# EAGLE board shutter_control_without_autorouter (EAGLE 7.1.0)
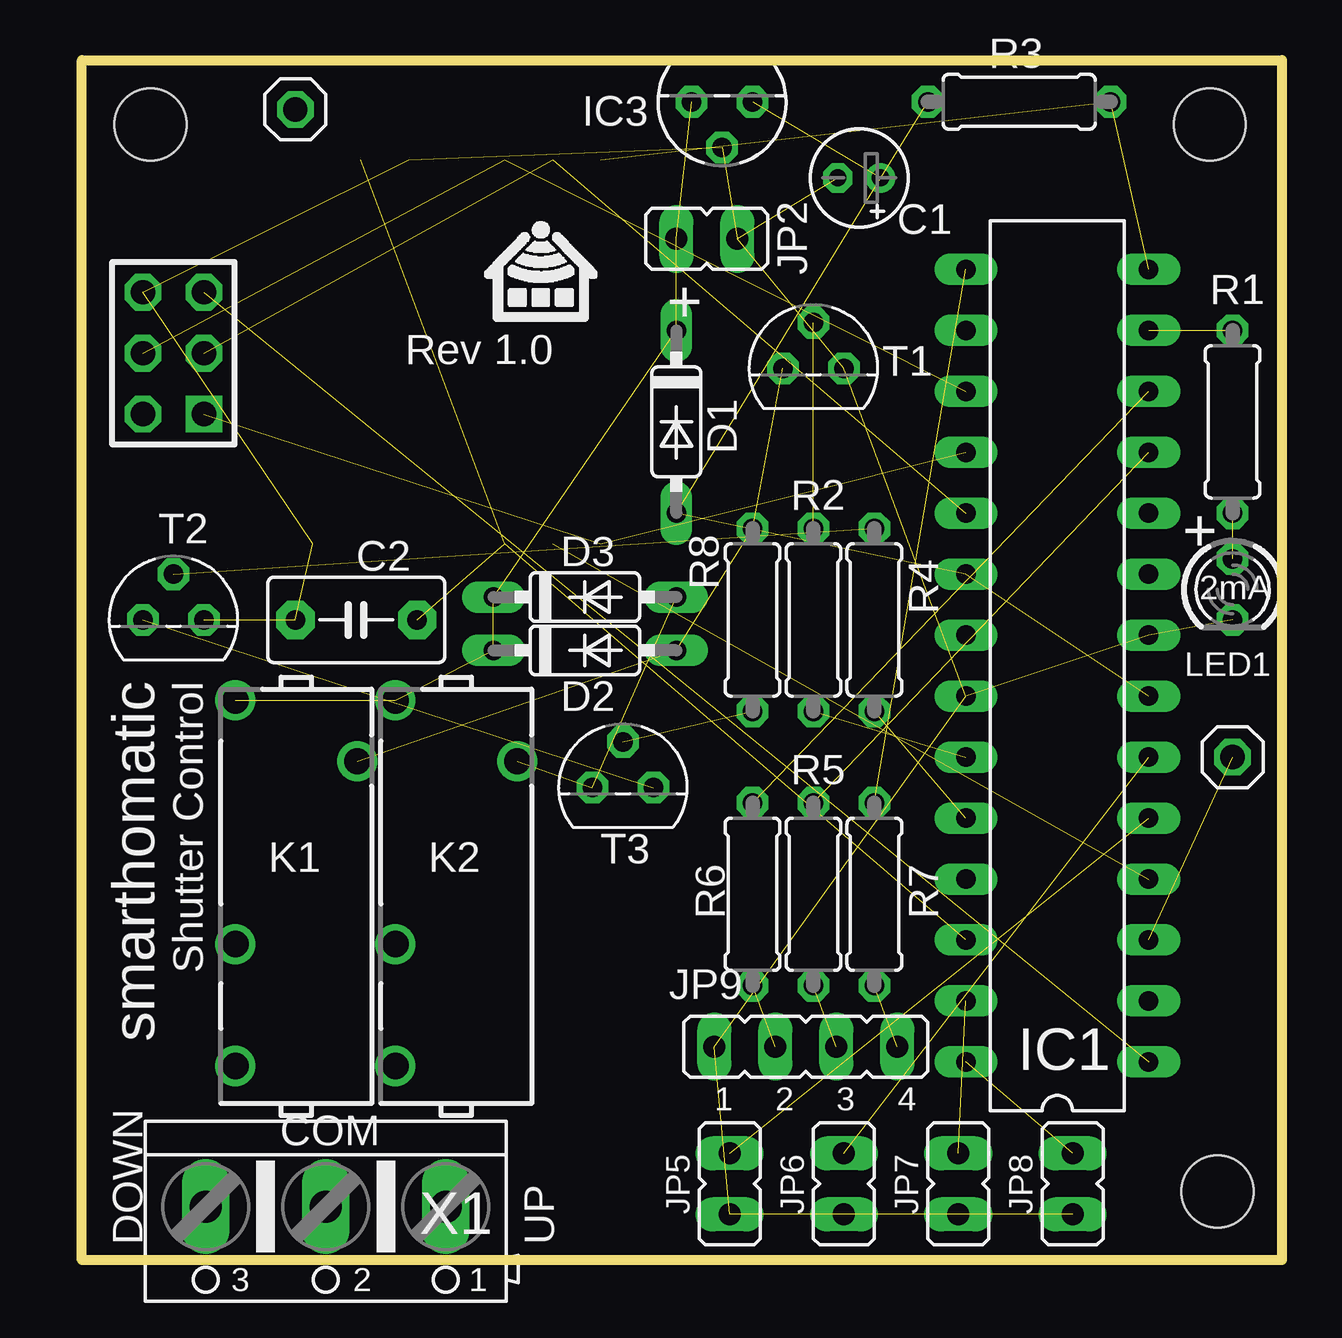
[diagram p0: board, top side]
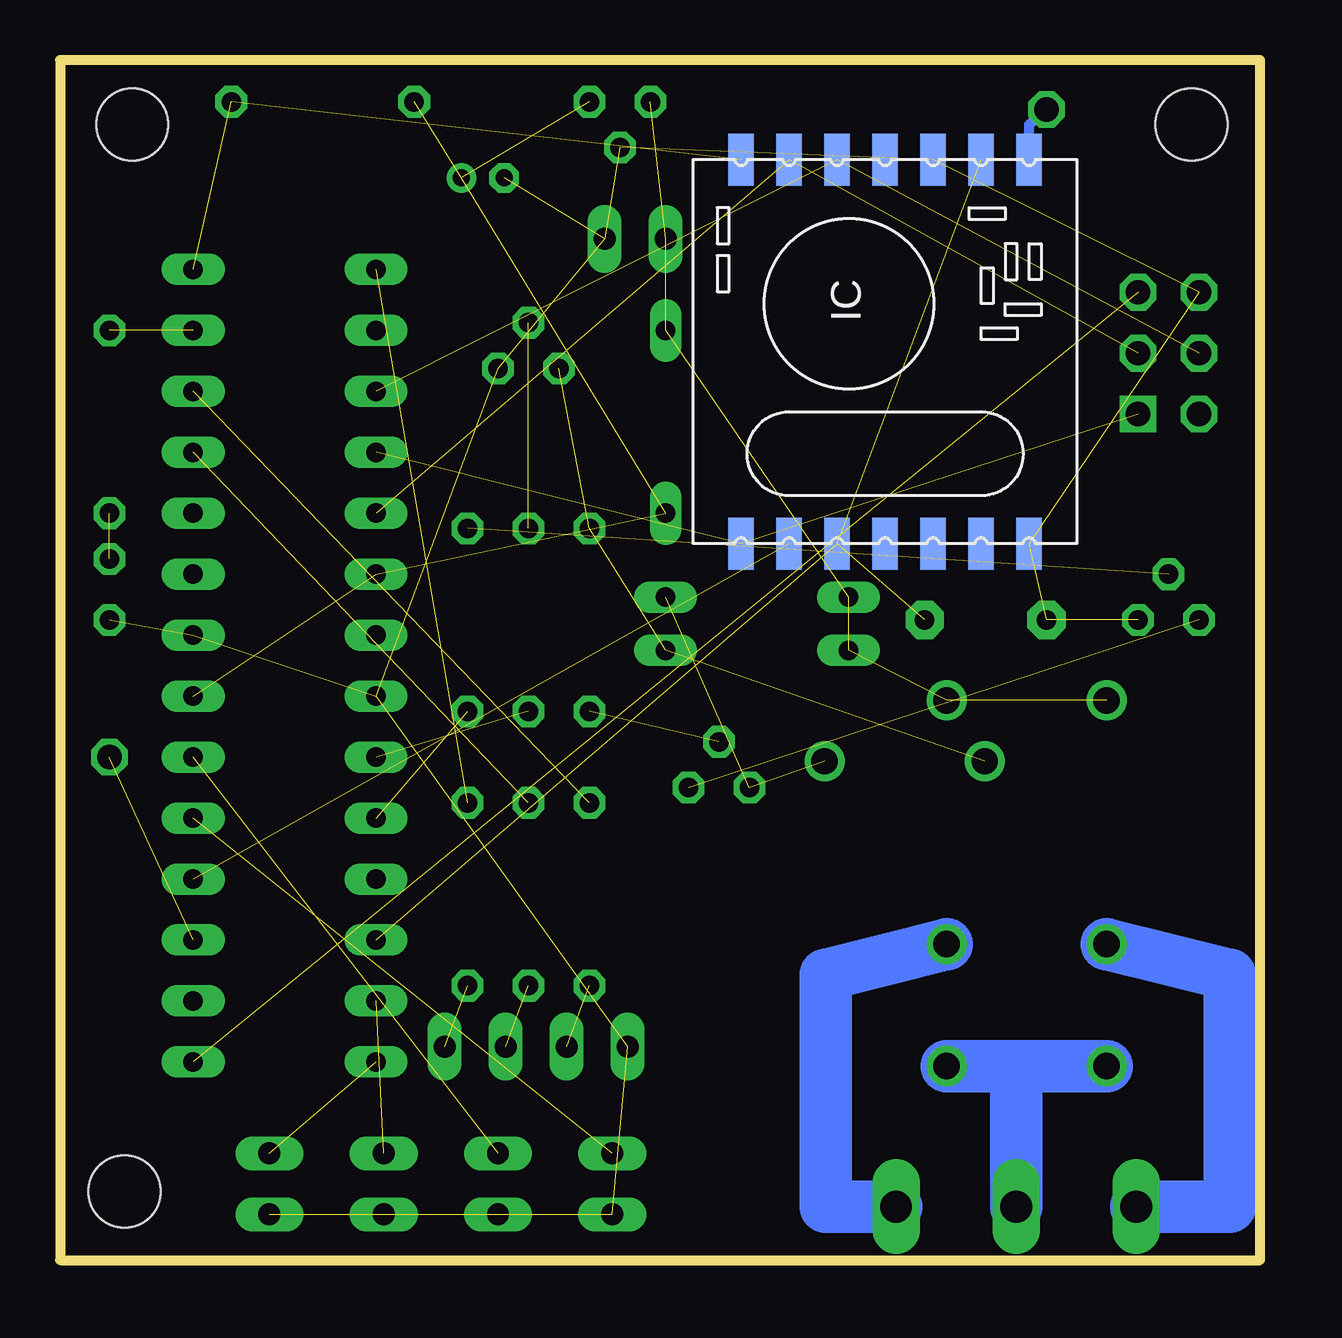
[diagram p1: board, bottom side, seen from below]

Size 50 x 50 mm. Coordinates in mm from the lower left corner, seen from the top.
Outline: 0,0 0,50 50,50 50,0 0,0
Copper layers (1*16): Top 0.035mm / dielectric 1.5mm / Bottom 0.035mm
Design rules "Fusion_eagle_rule_v1.1": minimum track width 6mil, minimum drill 12mil, track to track 6mil, track to pad 6mil, pad to pad 6mil, via to via 6mil, smd to smd 0mil, copper to edge 10mil, drill to drill 10mil, minimum pad ring 10mil, minimum via ring 6mil, stop-mask expansion 2mil, vias tented up to drill 100mil, thermal gap 10mil
Net classes: 0 default: clearance 0.305 mm
Holes 3 mm at 2.86,47.31 46.99,47.31 47.31,2.86
tRestrict: area 0,0 to 24.1,19.1
bRestrict: area 0,0 to 24.1,19.1

## Footprints (pad centres in the part's own frame; a part is rotated, then mirrored left to right if it is on the bottom)
E1,8-4 = drill 0.711 pad 1.168: + -0.889,0 | drill 0.711 pad 1.168 octagon: - 0.889,0
C5B3.5 = drill 0.813 pad 1.6 octagon: 1 -2.54,0; 2 2.54,0
DO35-7 = drill 0.813 long: A 3.81,0; C -3.81,0
DIL28-3 = drill 0.813 long: 1 -16.51,-3.81; 2 -13.97,-3.81; 3 -11.43,-3.81; 4 -8.89,-3.81; 5 -6.35,-3.81; 6 -3.81,-3.81; 7 -1.27,-3.81; 8 1.27,-3.81; 9 3.81,-3.81; 10 6.35,-3.81; 11 8.89,-3.81; 12 11.43,-3.81; 13 13.97,-3.81; 14 16.51,-3.81; 15 16.51,3.81; 16 13.97,3.81; 17 11.43,3.81; 18 8.89,3.81; 19 6.35,3.81; 20 3.81,3.81; 21 1.27,3.81; 22 -1.27,3.81; 23 -3.81,3.81; 24 -6.35,3.81; 25 -8.89,3.81; 26 -11.43,3.81; 27 -13.97,3.81; 28 -16.51,3.81
RFM = smd 2.184 x 1.067: 1 0,14; 2 0,12; 3 0,10; 4 0,8; 5 0,6; 6 0,4; 7 0,2; 8 16,2; 9 16,4; 10 16,6; 11 16,8; 12 16,10; 13 16,12; 14 16,14
TO92 = drill 0.813 octagon: 1 -1.27,0; 2 0,1.905; 3 1.27,0
AVR-ISP-6 = drill 1.016 square: 1 -2.54,-1.27 | drill 1.016 octagon: 2 -2.54,1.27; 3 0,-1.27; 4 0,1.27; 5 2.54,-1.27; 6 2.54,1.27
JP1 = drill 0.914 long: 1 0,-1.27; 2 0,1.27
1X01 = drill 1.016 octagon: 1 0,0
JP4 = drill 0.914 long: 1 -3.81,0; 2 -1.27,0; 3 1.27,0; 4 3.81,0
G6D = drill 1.1 pad 1.676: 1 8.08,2.5; 5 -2.08,2.5; 7 -7.16,2.5; 13 5.54,-2.58
LED3MM = drill 0.813 octagon: A -1.27,0; K 1.27,0
0207/7 = drill 0.813 octagon: 1 -3.81,0; 2 3.81,0
TO92' = drill 0.813 octagon: 1 1.27,0; 2 0,1.905; 3 -1.27,0
AK500/3 = drill 1.321 long: 1 -5.004,0; 2 0,0; 3 5.004,0

## Placement (x,y rotation side)
C1  10Âµ  [E1,8-4]  32.38,45.09 180 top
C2  1Âµ  [C5B3.5]  11.43,26.67 180 top
D1  1N4148  [DO35-7]  24.77,34.92 270 top
D2  1N4148  [DO35-7]  20.95,25.4 0 top
D3  1N4148  [DO35-7]  20.95,27.62 0 top
IC1  MEGA168/328  [DIL28-3]  40.64,24.77 90 top
IC2  RFM12  [RFM]  7.62,29.84 90 bottom
IC3  LP2950Z  [TO92]  26.67,48.26 180 top
JP1  AVR-ISP-6  [AVR-ISP-6]  3.81,37.78 90 top
JP2  PWR  [JP1]  26.04,42.55 90 top
JP3  ANT  [1X01]  8.89,47.94 90 top
JP4  PD1/TX  [1X01]  47.94,20.95 90 top
JP5  SW  [JP1]  26.99,3.17 180 top
JP6  SW  [JP1]  31.75,3.17 180 top
JP7  SW  [JP1]  36.51,3.17 180 top
JP8  SW  [JP1]  41.27,3.17 180 top
JP9  LED  [JP4]  30.16,8.89 0 top
K1  G6D-1A-ASI5VDC  [G6D]  8.89,15.24 90 top
K2  G6D-1A-ASI5VDC  [G6D]  15.56,15.24 90 top
LED1  2mA  [LED3MM]  47.94,27.94 270 top
R1  560R  [0207/7]  47.94,34.92 270 top
R2  560R  [0207/7]  30.48,26.67 270 top
R3  1M  [0207/7]  39.05,48.26 0 top
R4  560R  [0207/7]  33.02,26.67 270 top
R5  560R  [0207/7]  30.48,15.24 270 top
R6  560R  [0207/7]  27.94,15.24 270 top
R7  560R  [0207/7]  33.02,15.24 270 top
R8  560R  [0207/7]  27.94,26.67 90 top
T1  BC547  [TO92']  30.48,37.15 0 top
T2  BC547  [TO92']  3.81,26.67 0 top
T3  BC547  [TO92']  22.54,19.68 0 top
X1  SW Out  [AK500/3]  10.16,2.22 180 top

## Library data of the parts
C1 R1-R8 = rcl
C2 = capacitor-wima
D1-D3 = diode
IC1 JP1 = avr-5-4.16
IC2 = hopeRF
IC3 = linear
JP2 JP5-JP9 = jumper
JP3 JP4 = pinhead
K1 K2 = relay; OC_FARNELL: 9812660; OC_NEWARK: unknown
LED1 = led
T1-T3 = transistor
X1 = con-ptr500; OC_FARNELL: unknown; OC_NEWARK: unknown

## Nets
+3V3: C1.+ D1.A IC1.7 IC1.20 IC3.1 R3.1
+5V: D1.C D2.C D3.C IC3.3 JP2.2 K1.1 K2.1
GND: C1.- C2.2 IC1.8 IC1.22 IC2.7 IC2.10 IC3.2 JP1.6 JP2.1 JP5.2 JP6.2 JP7.2 JP8.2 JP9.1 LED1.K T1.1 T2.1
N$1: IC1.23 R2.2
N$3: IC1.17 IC2.12 JP1.4
N$4: IC1.18 IC2.1 JP1.1
N$5: IC1.19 IC2.13 JP1.3
N$6: IC1.13 R1.1
N$7: R2.1 T1.2
N$8: IC1.1 JP1.5
N$9: IC1.6 JP6.1
N$10: IC1.5 JP5.1
N$11: IC2.8 JP3.1
N$12: LED1.A R1.2
N$13: IC1.14 IC2.14 R3.2
N$14: IC1.24 R4.2
N$15: IC1.4 IC2.2
N$16: K1.7 K2.7 X1.2
N$17: R4.1 T2.2
N$18: D2.A K1.13 R8.2 T1.3
N$19: D3.A K2.13 T3.3
N$20: IC1.3 JP4.1
N$21: IC1.12 R6.1
N$22: C2.1 IC1.26 IC2.3 IC2.9
N$23: IC1.11 R5.1
N$24: IC1.15 R7.1
N$25: JP9.4 R7.2
N$26: JP9.3 R5.2
N$27: JP9.2 R6.2
N$28: IC1.27 JP7.1
N$29: K1.5 X1.3
N$30: K2.5 X1.1
N$31: IC1.28 JP8.1
N$32: T2.3 T3.1
N$34: R8.1 T3.2

## Tracks (layer width: path | path; a pad name or v marks a point on that pad's centre or on a via)
+3V3  (5 unrouted)
+5V  (6 unrouted)
GND  (16 unrouted)
N$1  (1 unrouted)
N$3  (2 unrouted)
N$4  (2 unrouted)
  Bottom 0.406: 21.62,29.21 IC2.1
N$5  (2 unrouted)
N$6  (1 unrouted)
N$7  (1 unrouted)
N$8  (1 unrouted)
N$9  (1 unrouted)
N$10  (1 unrouted)
N$11
  Bottom 0.406: IC2.8 9.62,47.31 JP3.1
N$12  (1 unrouted)
N$13  (2 unrouted)
N$14  (1 unrouted)
N$15  (1 unrouted)
N$16
  Bottom 2.184: X1.2 10.16,8.08 K1.7 K2.7
N$17  (1 unrouted)
N$18  (3 unrouted)
N$19  (2 unrouted)
N$20  (1 unrouted)
N$21  (1 unrouted)
N$22  (3 unrouted)
N$23  (1 unrouted)
N$24  (1 unrouted)
N$25  (1 unrouted)
N$26  (1 unrouted)
N$27  (1 unrouted)
N$28  (1 unrouted)
N$29
  Bottom 2.184: X1.3 1.27,2.22 1.27,11.89 K1.5
N$30
  Bottom 2.184: K2.5 18.1,11.89 18.1,2.22 X1.1
N$31  (1 unrouted)
N$32  (1 unrouted)
N$34  (1 unrouted)

## Text on the board
tNames: + | Rev 1.0 | + | 2mA | smarthomatic | Shutter Control | COM | DOWN | UP